# Altium PCB PCB1.PcbDoc (part 2 of 2)
Units mm, origin at the board's own origin, x right, y up, seen from the top; angles counter-clockwise.
Board outline 75.44 x 70.87 mm, 4 copper layers (Top Layer, Int1 (GND), Int2 (PWR), Bottom Layer), stack 1.586 mm thick; 102 components, 83 nets, 334 pads, 73 vias.
Unrouted connection lines stored in the file: 199.
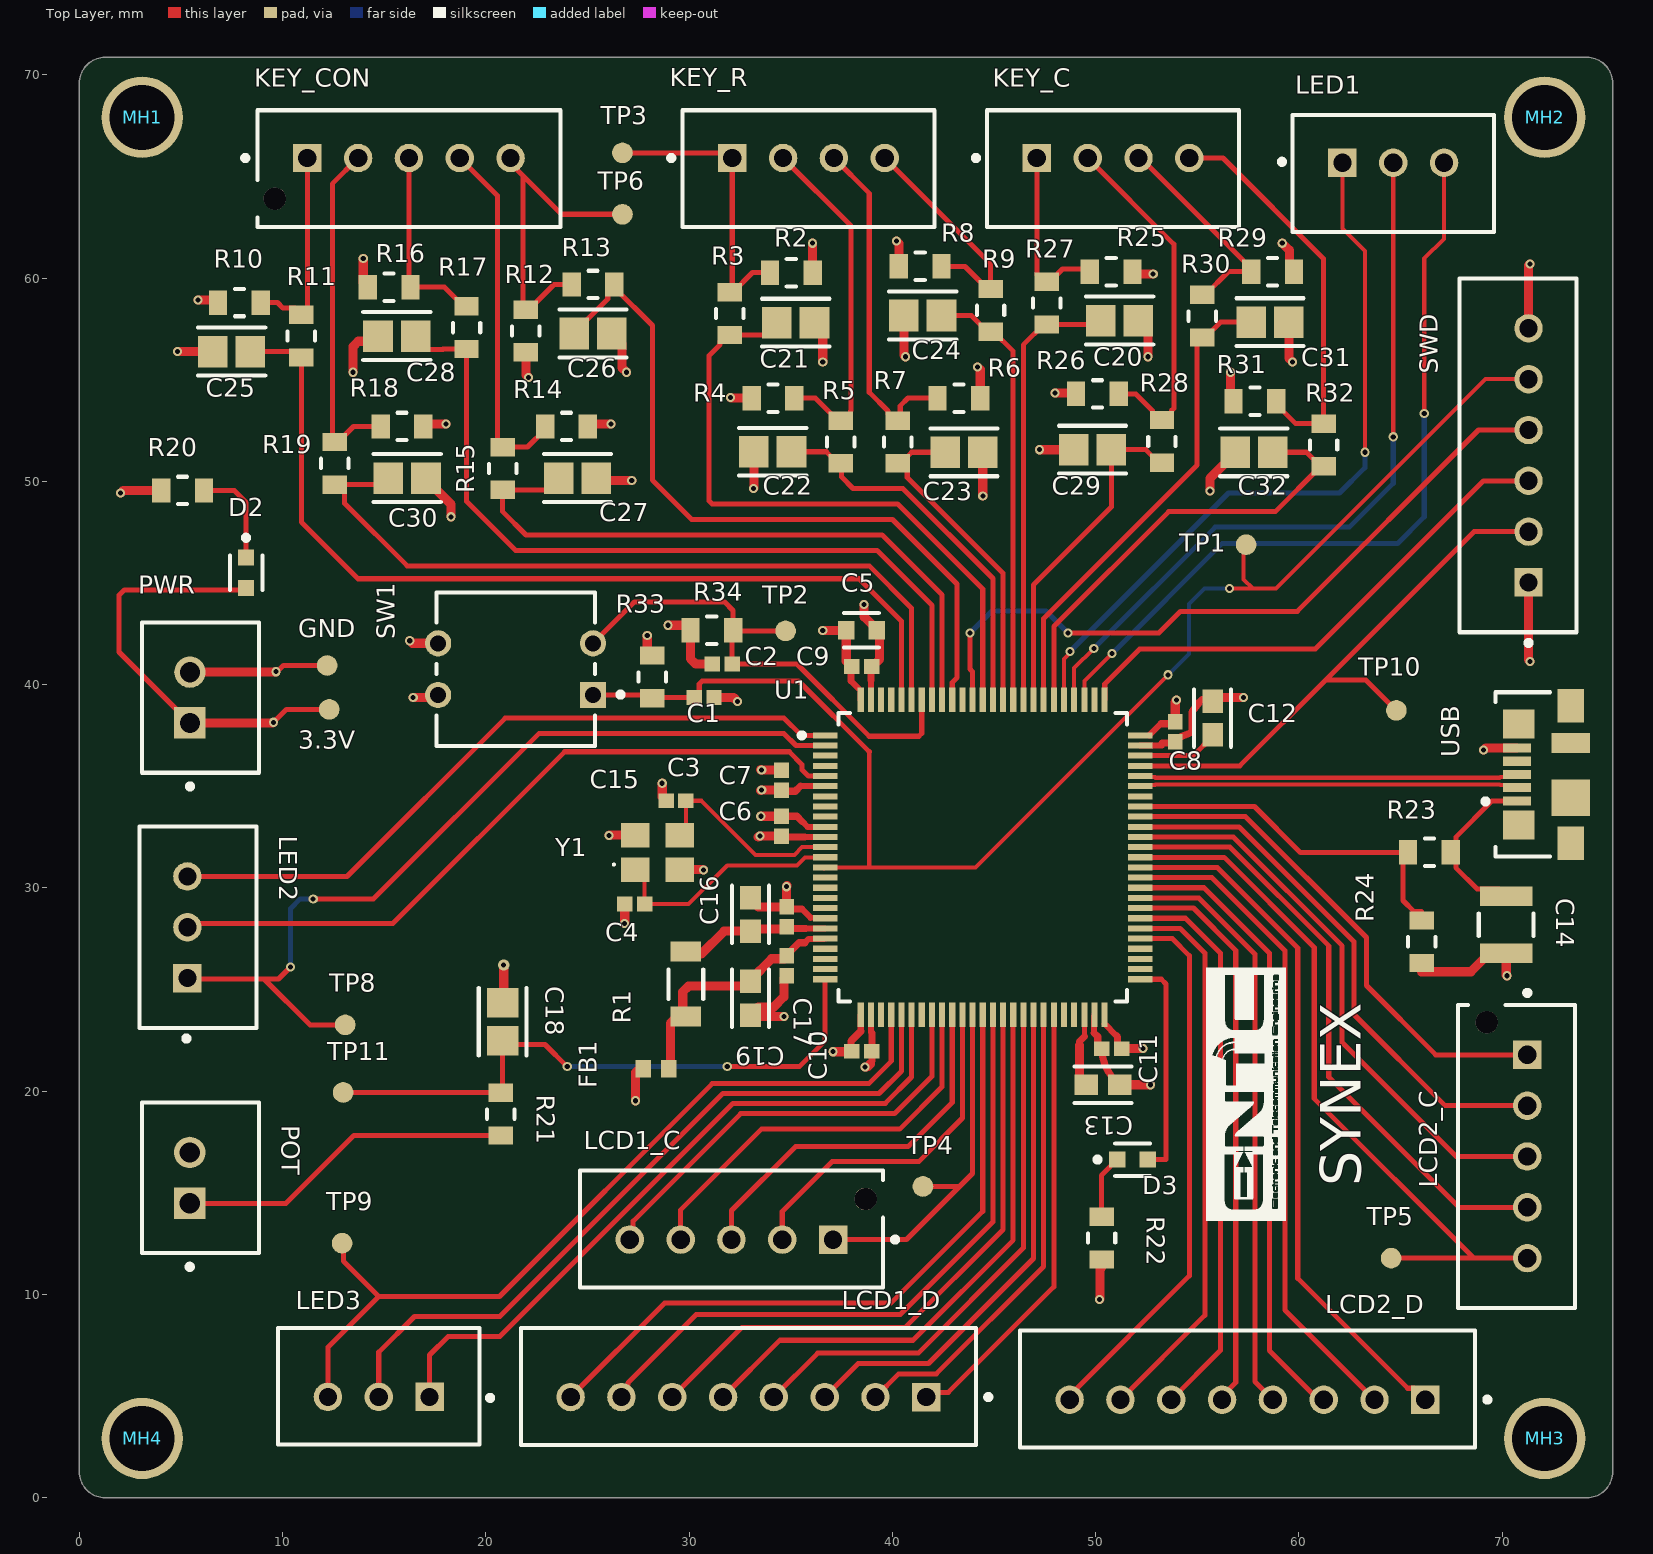
[diagram p0: Top Layer view]

## Via types
v1: diameter 0.45, hole 0.25, Top Layer to Bottom Layer, 72 vias
v2: diameter 0.55, hole 0.25, Top Layer to Bottom Layer, 1 vias

## Nets (pads, with @x,y where several pads share a name; then routed paths per layer and width w, separated by ;. In a path a pad name is that pad's centre, name@x,y a point inside that pad or via, vN(x,y) a via of type N, cw(c..) or ccw(c..) an arc to the next point about the centre after c; other vN are vias at no path point) (continued)
NetD3_1: (continued)
  Top Layer w0.25: R22.2@50.292,14.224 50.292,15.863 D3.1
NetPOT_1: POT.1 R21.2 | length 16.7
  Top Layer w0.25: POT.1 10.169,14.487 13.504,17.822 R21.2
NRST: C1.2 R33.1 SW1.1 SWD.5 TP1.1 U1.14 | length 69.9
  Top Layer w0.2: R33.1@28.033,39.497 R33.1 ; U1.14@36.645,30.959 U1.14 38.862,31.009 ; 38.862,36.703 38.862,31.009 ; v1(53.569,40.488) 44.09,31.009 38.862,31.009 ; v1(56.591,44.729) 57.734,44.729 ; TP1.1 57.277,46.761 57.277,45.187 57.734,44.729 ; SWD.5 69.179,55.031 58.877,44.729 57.734,44.729
  Top Layer w0.25: SW1.1 R33.1@28.033,39.497 ; R33.1 28.228,39.37 30.264,39.37 30.499,39.605 30.499,40.036 30.645,40.183 35.382,40.183 38.862,36.703
  Bottom Layer w0.2: v1(53.569,40.488) 54.585,41.504 54.585,43.967 55.347,44.729 v1(56.591,44.729)
OK: C25.1 R11.1 U1.96 | length 46.1
  Top Layer w0.25: C25.1 10.634,56.388 R11.1 10.922,48.006 13.716,45.212 38.354,45.212 40.445,43.121 U1.96
OK_I: KEY_CON.1 R10.2 R11.2 | length 10.1
  Top Layer w0.25: R10.2 9.749,58.801 10.025,58.525 10.597,58.525 R11.2 11.216,58.494 KEY_CON.1
P1: C18.1 R21.1 TP11.1 U1.25 | length 30.3
  Top Layer w0.25: TP11.1 20.71,19.939 R21.1 20.828,20.024 C18.1 21.02,22.301 22.911,22.301 v1(24.003,21.209) ; v1(31.877,21.209) 35.418,21.209 36.695,22.487 U1.25
  Bottom Layer w0.25: v1(24.003,21.209) v1(31.877,21.209)
RIGHT: C30.1 R19.1 U1.95 | length 38.5
  Top Layer w0.25: C30.1 14.881,49.843 R19.1 12.723,49.843 13.048,49.518 13.048,48.928 16.129,45.847 38.862,45.847 40.945,43.764 U1.95
RIGHT_I: KEY_CON.2 R18.2 R19.2 | length 17.1
  Top Layer w0.25: KEY_CON.2 12.446,64.643 12.446,52.07 R19.2 12.723,51.943 13.485,52.705 R18.2
S1DS: LED3.1 U1.31 | length 34.5
  Top Layer w0.25: LED3.1 17.232,7.021 18.146,7.936 20.686,7.936 32.156,19.406 39.649,19.406 40.945,20.701 U1.31
S2SHCP: LED3.3 TP9.1 U1.29 | length 41.6
  Top Layer w0.25: LED3.3 12.232,7.406 14.732,9.906 ; TP9.1 12.999,12.452 12.999,11.639 14.732,9.906 ; U1.29 39.945,21.479 38.837,20.371 31.14,20.371 20.676,9.906 14.732,9.906
S2STCP: LED3.2 U1.30 | length 36.4
  Top Layer w0.25: LED3.2 14.732,7.163 16.485,8.915 20.689,8.915 31.662,19.888 39.345,19.888 40.445,20.989 U1.30
SWCLK: SWD.3 U1.76 | length 25.8
  Top Layer w0.25: U1.76 50.449,39.263 50.449,40.035 52.172,41.758 60.808,41.758 69.081,50.031 SWD.3
SWDIO: SWD.2 TP10.1 U1.72 | length 28
  Top Layer w0.25: U1.72 57.091,36.009 61.319,40.237 ; TP10.1 63.293,40.237 61.319,40.237 ; SWD.2 68.613,47.531 61.319,40.237
SWO: SWD.4 U1.89 | length 35.9
  Top Layer w0.25: v1(43.815,42.545) 43.815,40.767 43.945,40.637 U1.89 ; v1(48.641,42.545) 53.111,42.545 54.178,43.612 59.919,43.612 68.838,52.531 SWD.4
  Bottom Layer w0.25: v1(43.815,42.545) 44.9,43.63 47.556,43.63 v1(48.641,42.545)
Test: D3.2 U1.51 | length 10.9
  Top Layer w0.25: U1.51 53.231,25.509 53.467,25.273 53.467,16.637 D3.2
UP: C26.1 R13.1 U1.91 | length 36.5
  Top Layer w0.25: C26.1 24.347,57.328 25.998,58.979 25.998,59.365 R13.1 26.323,59.54 28.194,57.669 28.194,50.063 30.124,48.133 40.005,48.133 43.18,44.958 43.18,40.348 42.945,40.113 U1.91
UP_I: KEY_CON.5 R12.2 R13.2 TP6.1 | length 16.1
  Top Layer w0.25: KEY_CON.5 21.216,65.652 21.821,65.047 ; R13.2 23.357,59.69 22.271,58.604 21.821,58.604 21.821,65.047 ; TP6.1 23.724,63.144 21.821,65.047
USBD_N: U1.70 USB.2 | length 18.6
  Top Layer w0.2: U1.70 52.245,35.059 52.92,35.059 52.956,35.095 61.576,35.095 61.577,35.096 69.87,35.096 69.906,35.06 70.596,35.06 USB.2
USBD_P: U1.71 USB.3 | length 18.6
  Top Layer w0.2: U1.71 52.245,35.459 52.92,35.459 52.956,35.422 61.441,35.422 61.441,35.423 69.87,35.423 69.906,35.46 70.596,35.46 USB.3
VBUS_Sense: R23.1 R24.2 U1.68 | length 17.4
  Top Layer w0.25: U1.68 57.812,34.009 60.071,31.75 65.12,31.75 65.12,29.379 65.67,28.829 R24.2@66.04,28.829
pads on no net: KEY_CON. LCD1_C. LCD2_C. MH1.1 MH2.4 MH3.3 MH4.2 POT.2 U1.3 U1.4 U1.7 U1.8 U1.9 U1.15 U1.16 U1.17 U1.18 U1.22 U1.23 U1.24 U1.28 U1.32 U1.46 U1.47 U1.52 U1.53 U1.54 U1.69 U1.77 U1.90 U1.97 U1.98 USB.4 USB.6 USB.7 USB.8 USB.9 USB.10 USB.11

## Polygon pours and split planes (outlines as drawn)
+3.3V on Int2 (PWR) "+3.3V_L03_P002" (solid, pour order 2): 0.764,70.358 74.676,70.358 74.676,0.763 0.509,0.507
GND on Int1 (GND) "GND_L02_P001" (solid, pour order 1): 0.762,70.358 74.422,70.358 74.676,0.508 0.762,0.508

## Silkscreen, mask and mechanical layers (free items; w line width, h text height)
Top Overlay:
  region: 5 vertices and 48 holes, not listed, extent 55.431,13.635 59.364,26.081
  text "SYNEX" at 63.043,15.316 h2 r90
Mechanical 1:
  lines w0.254: 0,1.27 ccw(c1.27,1.27) 1.27,0 73.152,0 74.168,0 ccw(c74.168,1.27) 75.438,1.27 75.438,67.818 75.438,69.596 ccw(c74.168,69.596) 74.168,70.866 3.048,70.866 1.27,70.866 ccw(c1.27,69.596) 0,69.596 0,2.794 0,1.27